# EAGLE board D1-Nixi-6csöves-z573m-V2 (EAGLE 6.3)
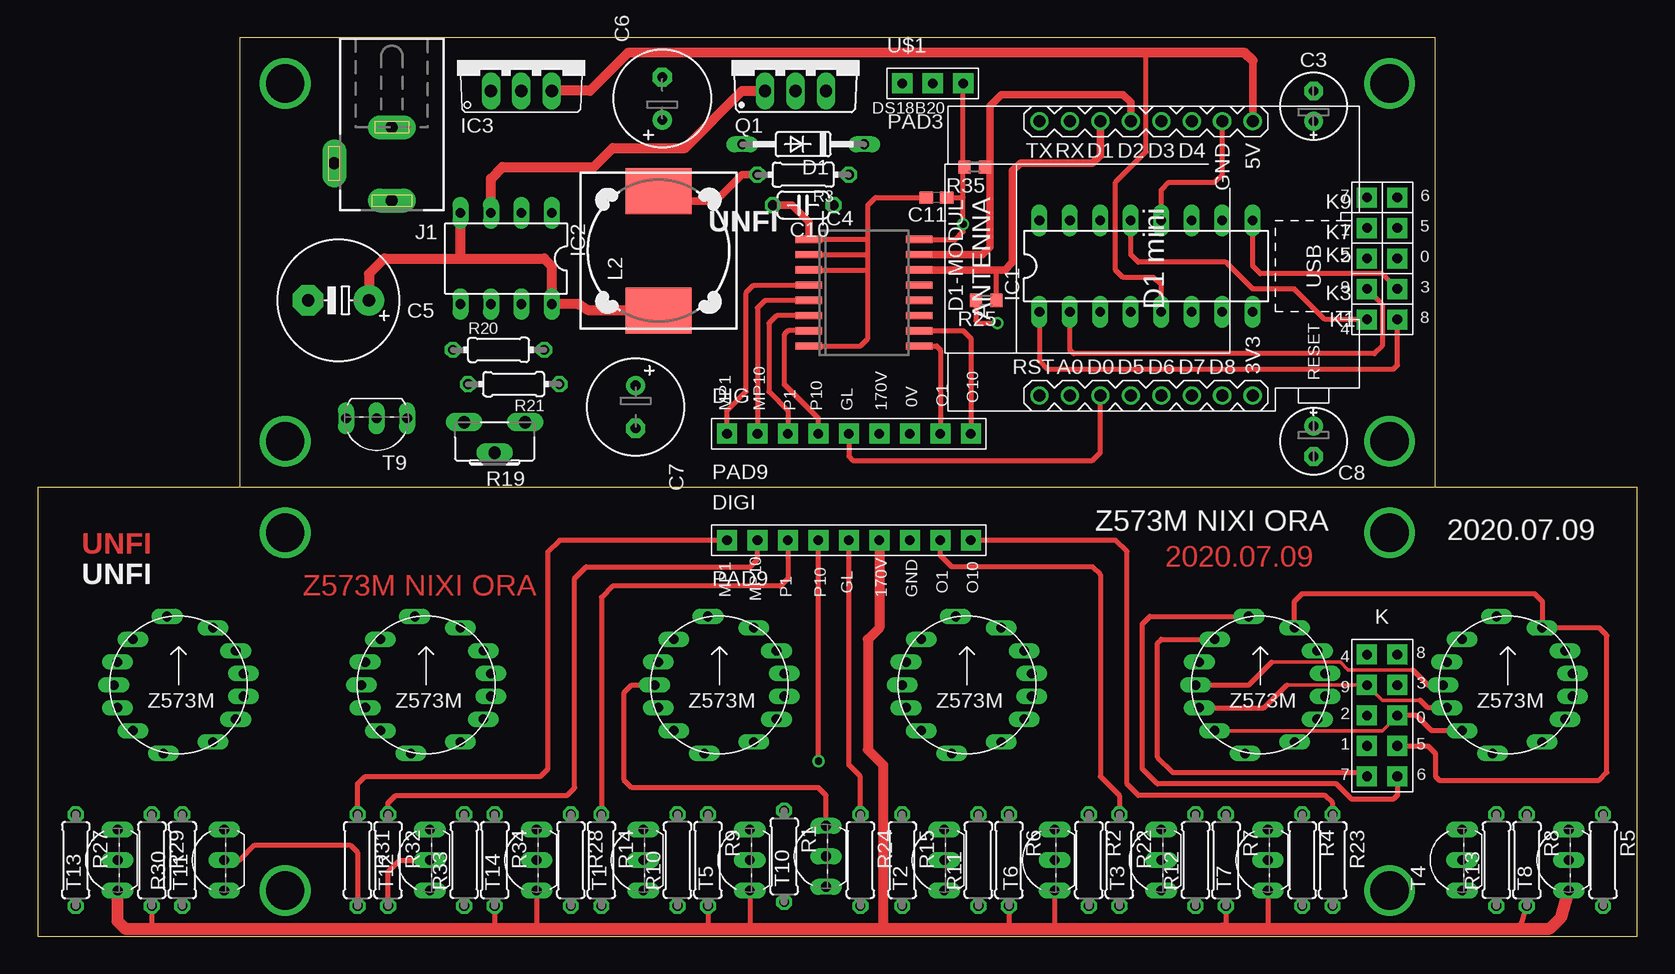
[diagram p0: board, top side]
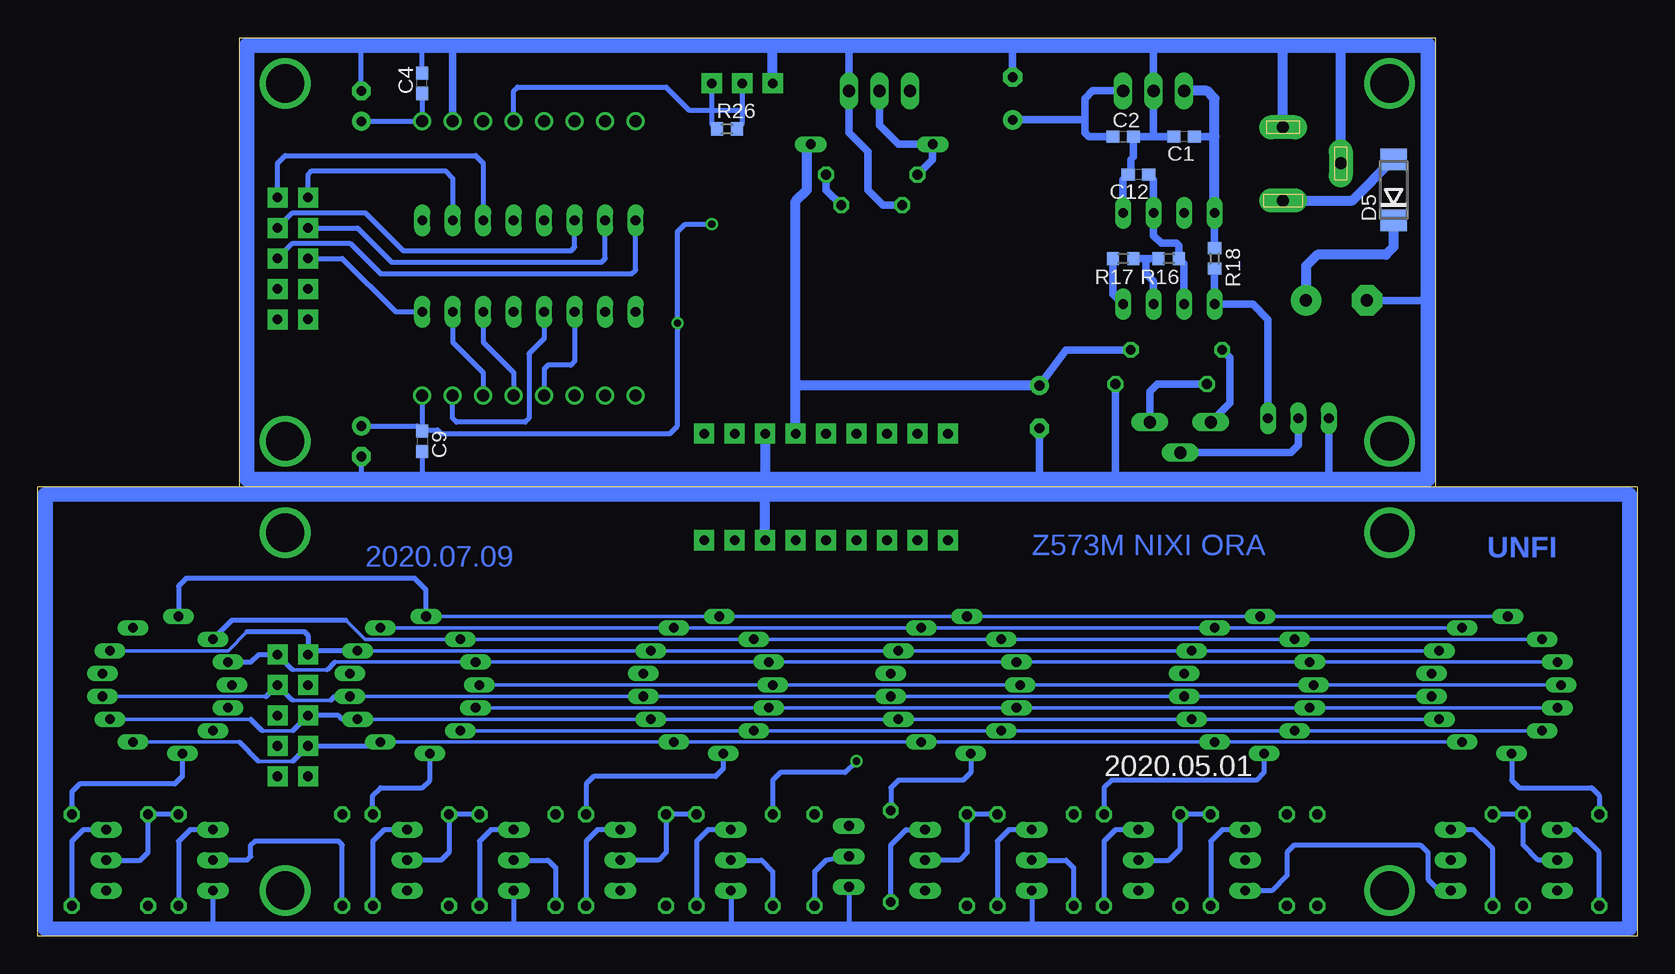
[diagram p1: board, bottom side, seen from below]

Size 133.35 x 74.93 mm. Coordinates in mm from the lower left corner, seen from the top.
Outline: 16.83,37.47 0,37.47 0,0 133.35,0 133.35,37.47 116.52,37.47
Outline: 16.83,37.47 116.5,37.47 116.5,74.92 16.83,74.92
Outline: 16.83,74.93 16.83,74.92
Outline: 16.83,74.92 16.83,37.47
Copper layers (1*16): Top 0.035mm / dielectric 1.5mm / Bottom 0.035mm
Design rules "default": minimum track width 10mil, minimum drill 24mil, track to track 8mil, track to pad 8mil, pad to pad 8mil, via to via 8mil, smd to smd 8mil, copper to edge 40mil, drill to drill 8mil, minimum pad ring 10mil, minimum via ring 8mil, stop-mask expansion 4mil, vias tented up to drill 0mil, thermal gap 10mil

## Footprints (pad centres in the part's own frame; a part is rotated, then mirrored left to right if it is on the bottom)
C0603 = smd 1.1 x 1: 1 -0.85,0; 2 0.85,0
E2,5-6E = drill 0.813 pad 1.575: + -1.27,0 | drill 0.813 pad 1.575 octagon: - 1.27,0
E5-10,5 = drill 1.016 pad 2.54: + -2.54,0 | drill 1.016 pad 2.54 octagon: - 2.54,0
E3,5-8 = drill 0.813 pad 1.6: + -1.778,0 | drill 0.813 pad 1.6 octagon: - 1.778,0
C050-024X044 = drill 0.813 octagon: 1 -2.54,0; 2 2.54,0
DO35-10 = drill 0.813 long: A 5.08,0; C -5.08,0
WEMOS-D1-MINI = drill 1: JP1.1 -11.43,9.525; JP1.2 -11.43,6.985; JP1.3 -11.43,4.445; JP1.4 -11.43,1.905; JP1.5 -11.43,-0.635; JP1.6 -11.43,-3.175; JP1.7 -11.43,-5.715; JP1.8 -11.43,-8.255; JP2.1 11.43,9.525; JP2.2 11.43,6.985; JP2.3 11.43,4.445; JP2.4 11.43,1.905; JP2.5 11.43,-0.635; JP2.6 11.43,-3.175; JP2.7 11.43,-5.715; JP2.8 11.43,-8.255
DO214AA = smd 1.8 x 2.2: A 2.55,0; C -2.55,0
PAD9 = drill 0.8 pad 1.676 square: P$1 0,0; P$2 2.54,0; P$3 5.08,0; P$4 7.62,0; P$5 10.16,0; P$6 12.7,0; P$7 15.24,0; P$8 17.78,0; P$9 20.32,0
DIL16 = drill 0.813 long: 1 -8.89,-3.81; 2 -6.35,-3.81; 3 -3.81,-3.81; 4 -1.27,-3.81; 5 1.27,-3.81; 6 3.81,-3.81; 7 6.35,-3.81; 8 8.89,-3.81; 9 8.89,3.81; 10 6.35,3.81; 11 3.81,3.81; 12 1.27,3.81; 13 -1.27,3.81; 14 -3.81,3.81; 15 -6.35,3.81; 16 -8.89,3.81
DIL08 = drill 0.813 long: 1 -3.81,-3.81; 2 -1.27,-3.81; 3 1.27,-3.81; 4 3.81,-3.81; 5 3.81,3.81; 6 1.27,3.81; 7 -1.27,3.81; 8 -3.81,3.81
TO220V = drill 1.016 long: 1 -2.54,-2.54; 2 0,-2.54; 3 2.54,-2.54
SO16W = smd 0.6 x 2.2: 1 -4.445,-4.6; 2 -3.175,-4.6; 3 -1.905,-4.6; 4 -0.635,-4.6; 5 0.635,-4.6; 6 1.905,-4.6; 7 3.175,-4.6; 8 4.445,-4.6; 9 4.445,4.6; 10 3.175,4.6; 11 1.905,4.6; 12 0.635,4.6; 13 -0.635,4.6; 14 -1.905,4.6; 15 -3.175,4.6; 16 -4.445,4.6
DCJ0202 = drill 1 pad 2 long: 1 0,3.1; 2 4.8,0; 3 0,-3
PAD25 = drill 0.8 pad 1.676 square: P$1 0,0; P$2 0,2.54; P$3 2.54,0; P$4 2.54,2.54; P$5 5.08,0; P$6 5.08,2.54; P$7 7.62,0; P$8 7.62,2.54; P$9 10.16,0; P$10 10.16,2.54
PAD1 = drill 0.8 pad 1.676 square: 1 0,0
DR125 = smd 3.85 x 5.5: 1 -4.975,0; 2 4.975,0
Z573SZ1 = drill 0.8 pad 1.27 long: A 1.27,5.715; DP 5.397,0; IC -5.397,-0.953; K0 3.81,3.81; K1 -2.857,4.763; K2 -4.763,2.857; K3 -5.397,0.953; K4 -4.763,-2.857; K5 -2.857,-4.763; K6 0.953,-5.715; K7 3.81,-3.81; K8 5.08,-1.905; K9 5.08,1.905
TO220BV = drill 1.016 long: D 0,-2.54; G -2.54,-2.54; S 2.54,-2.54
0207/7 = drill 0.813 octagon: 1 -3.81,0; 2 3.81,0
0204/7 = drill 0.813 octagon: 1 -3.81,0; 2 3.81,0
R0603 = smd 1 x 1.1: 1 -0.85,0; 2 0.85,0
CA6H = drill 1.016 long: A -2.54,0; E 2.54,0; S 0,2.54
TO92-EBC = drill 0.813 long: B 0,-1.27; C 2.54,-1.27; E -2.54,-1.27
TO92-CBE = drill 0.813 long: B 0,0; C -2.54,0; E 2.54,0
PAD3 = drill 0.8 pad 1.676 square: P$1 0,0; P$2 2.54,0; P$3 5.08,0

## Placement (x,y rotation side)
C1  100n  [C0603]  37.78,66.68 180 bottom
C2  100n  [C0603]  42.86,66.68 0 bottom
C3  10u  [E2,5-6E]  106.36,69.22 90 top
C4  100n  [C0603]  101.28,71.12 90 bottom
C5  470uF  [E5-10,5]  25.08,53.02 180 top
C6  100uF  [E3,5-8]  52.07,69.85 90 top
C7  2,2uF 400V  [E3,5-8]  49.85,44.13 270 top
C8  10u  [E2,5-6E]  106.36,41.28 270 top
C9  100n  [C0603]  101.28,41.28 270 bottom
C10  100p  [C050-024X044]  63.82,60.96 180 top
C11  100n  [C0603]  74.93,61.59 180 top
C12  2n2  [C0603]  41.59,63.5 180 bottom
D1  UF4004  [DO35-10]  63.82,66.04 180 top
D1-MODUL  WEMOS-D1-MINI  [WEMOS-D1-MINI]  93.03,56.52 90 top
D5  1S34  [DO214AA]  20.32,62.23 90 bottom
DIG  PAD9  [PAD9]  57.47,41.91 0 top
DIGI  PAD9  [PAD9]  57.47,33.02 0 top
IC1  74141N  [DIL16]  92.39,55.88 0 top
IC2  ICM7555  [DIL08]  39.05,56.52 180 top
IC3  7805  [TO220V]  40.32,73.03 0 top
IC4  PCF8574T  [SO16W]  68.9,53.66 270 top
J1  DCJ0202  [DCJ0202]  29.53,64.45 180 top
K  PAD25  [PAD25]  110.81,23.5 270 top
K0  PAD1  [PAD1]  113.35,61.59 90 top
K1  PAD1  [PAD1]  110.81,51.44 90 top
K2  PAD1  [PAD1]  113.35,51.44 90 top
K3  PAD1  [PAD1]  110.81,53.98 90 top
K4  PAD1  [PAD1]  113.35,53.98 90 top
K5  PAD1  [PAD1]  110.81,56.52 90 top
K6  PAD1  [PAD1]  113.35,56.52 90 top
K7  PAD1  [PAD1]  110.81,59.06 90 top
K8  PAD1  [PAD1]  113.35,59.06 90 top
K9  PAD1  [PAD1]  110.81,61.59 90 top
L2  DR125  [DR125]  51.75,57.15 90 top
M.PERC1  ora10  [Z573SZ1]  11.75,20.96 180 top
M.PERC10  Z573SZ1  [Z573SZ1]  32.38,20.96 180 top
ORA1  Z573SZ1  [Z573SZ1]  101.92,20.96 180 top
ORA10  Z573SZ1  [Z573SZ1]  122.56,20.96 180 top
PERC1  ora10  [Z573SZ1]  56.83,20.96 180 top
PERC10  Z573SZ1  [Z573SZ1]  77.47,20.96 180 top
Q1  IRF740  [TO220BV]  63.18,73.03 0 top
R1  15k  [0207/7]  62.23,6.67 270 top
R2  15k  [0207/7]  87.63,6.35 270 top
R3  2k2  [0204/7]  63.82,63.5 180 top
R4  15k  [0207/7]  105.41,6.35 270 top
R5  15k  [0207/7]  130.49,6.35 270 top
R6  100k  [0207/7]  80.96,6.35 270 top
R7  100k  [0207/7]  99.06,6.35 270 top
R8  100k  [0207/7]  124.14,6.35 270 top
R9  100k  [0207/7]  55.88,6.35 270 top
R10  470k  [0207/7]  53.34,6.35 90 top
R11  470k  [0207/7]  78.42,6.35 90 top
R12  470k  [0207/7]  96.52,6.35 90 top
R13  470k  [0207/7]  121.6,6.35 90 top
R14  10k  [0207/7]  46.99,6.35 270 top
R15  10k  [0207/7]  72.07,6.35 270 top
R16  10k  [R0603]  39.05,56.52 180 bottom
R17  1k  [R0603]  42.86,56.52 180 bottom
R18  56k  [R0603]  35.24,56.52 270 bottom
R19  1k  [CA6H]  38.1,42.86 180 top
R20  220k  [0204/7]  38.42,48.9 0 top
R21  470  [0204/7]  39.69,46.04 180 top
R22  10k  [0207/7]  90.17,6.35 270 top
R23  10k  [0207/7]  107.95,6.35 270 top
R24  10k  [0207/7]  68.58,6.35 270 top
R25  3k3  [R0603]  79.06,53.02 180 top
R26  3k3  [R0603]  75.88,67.31 0 bottom
R27  15k  [0207/7]  3.18,6.35 270 top
R28  15k  [0207/7]  44.45,6.35 270 top
R29  100k  [0207/7]  9.53,6.35 270 top
R30  470k  [0207/7]  12.07,6.35 90 top
R31  10k  [0207/7]  26.67,6.35 270 top
R32  10k  [0207/7]  29.21,6.35 270 top
R33  470k  [0207/7]  35.56,6.35 90 top
R34  100k  [0207/7]  38.1,6.35 270 top
R35  3k3  [R0603]  78.11,64.14 180 top
T1  MPSA42  [TO92-EBC]  49.21,6.35 90 top
T2  MPSA42  [TO92-EBC]  74.3,6.35 90 top
T3  MPSA42  [TO92-EBC]  92.39,6.35 90 top
T4  MPSA42  [TO92-EBC]  117.47,6.35 90 top
T5  MPSA92  [TO92-EBC]  58.1,6.35 90 top
T6  MPSA92  [TO92-EBC]  83.5,6.35 90 top
T7  MPSA92  [TO92-EBC]  101.28,6.35 90 top
T8  MPSA92  [TO92-EBC]  126.36,6.35 90 top
T9  BC337  [TO92-CBE]  28.26,43.18 180 top
T10  MPSA42  [TO92-EBC]  64.45,6.67 90 top
T11  MPSA42  [TO92-EBC]  14.29,6.35 90 top
T12  MPSA42  [TO92-EBC]  31.43,6.35 90 top
T13  MPSA92  [TO92-EBC]  5.4,6.35 90 top
T14  MPSA92  [TO92-EBC]  40.32,6.35 90 top
U$1  PAD3  [PAD3]  72.07,71.12 0 top

## Library data of the parts
C1-C12 R1-R18 R20-R35 = resistor
D1 D5 = diode
D1-MODUL = diy-modules
DIG DIGI K K0 K1-K9 U$1 = tuskesor
IC1 = 74xx-eu
IC2 = maxim1; MF: MAXIM; MPN: ICM7555IPA+; OC_FARNELL: 9663762; OC_NEWARK: 68K4387
IC3 = linear
IC4 = micro-philips; MPN: PCF8574T/3,512; OC_FARNELL: 1201255; OC_NEWARK: 70R6870
J1 = con-jack; OC_FARNELL: unknown; OC_NEWARK: unknown
L2 = inductors
M.PERC1 M.PERC10 ORA1 ORA10 PERC1 PERC10 =    Z573M
Q1 = transistor-power
R19 = pot
T1-T14 = transistor

## Nets
0V: C1.2 C2.2 C3.- C4.2 C5.- C6.- C7.- C8.- C9.2 C10.2 C11.2 C12.2 D1-MODUL.JP2.7 DIG.P$7 IC1.12 IC2.1 IC3.2 IC4.1 IC4.2 IC4.3 IC4.8 J1.2 J1.3 Q1.S R21.1 T9.E U$1.P$1
3V3: C8.+ C9.1 C11.1 D1-MODUL.JP1.8 IC4.16 R25.2 R26.1 R35.2 U$1.P$3
+12V: C1.1 C5.+ D5.C IC2.4 IC2.8 IC3.1 L2.1 R17.2 R18.1
A: D1-MODUL.JP1.4 IC1.3
B: D1-MODUL.JP1.5 IC1.6
C: D1-MODUL.JP1.6 IC1.7
D: D1-MODUL.JP1.7 IC1.4
GND: DIGI.P$7 T1.E T2.E T3.E T4.E T10.E
GND1: T11.E T12.E
N$1: DIG.P$9 IC4.10
N$2: DIG.P$4 IC4.7
N$3: DIG.P$8 IC4.9
N$4: DIG.P$1 IC4.4
N$5: DIG.P$2 IC4.5
N$6: DIG.P$3 IC4.6
N$7: IC1.16 K6.1
N$8: IC1.10 K9.1
N$9: IC1.15 K7.1
N$10: PERC1.A R1.1
N$11: PERC10.A R2.1
N$12: ORA1.A R4.1
N$13: ORA10.A R5.1
N$14: R1.2 T5.C
N$15: R2.2 T6.C
N$16: R4.2 T7.C
N$17: R5.2 T8.C
N$18: R19.E R20.1
N$19: R10.1 T1.C
N$20: R19.A R21.2
N$21: R9.1 R10.2 T5.B
N$22: IC2.3 Q1.G
N$23: IC2.7 R16.2 R17.1
N$24: C12.1 IC2.2 IC2.6 R16.1
N$25: R6.1 R11.2 T6.B
N$26: IC2.5 R18.2 T9.C
N$27: C10.1 R3.1
N$28: C7.+ D1.C DIG.P$6 R20.2
N$29: R7.1 R12.2 T7.B
N$30: R8.1 R13.2 T8.B
N$31: R11.1 T2.C
N$32: R12.1 T3.C
N$33: R13.1 T4.C
N$34: R14.2 T1.B
N$35: R15.2 T2.B
N$36: R22.2 T3.B
N$37: R23.2 T4.B
N$38: R24.2 T10.B
N$39: DIGI.P$6 R6.2 R7.2 R8.2 R9.2 R29.2 R34.2 T5.E T6.E T7.E T8.E T13.E T14.E
N$40: DIGI.P$3 R14.1
N$41: DIGI.P$4 R15.1
N$42: K.P$6 M.PERC1.K0 M.PERC10.K0 ORA1.K0 ORA10.K0 PERC1.K0 PERC10.K0
N$44: D1.A L2.2 Q1.D R3.2
N$45: K.P$7 M.PERC1.K1 M.PERC10.K1 ORA1.K1 ORA10.K1 PERC1.K1 PERC10.K1
N$46: IC1.8 K5.1
N$47: IC1.9 K4.1
N$48: IC1.2 K3.1
N$49: IC1.1 K2.1
N$50: IC1.13 K1.1
N$51: IC1.14 K8.1
N$52: IC1.11 K0.1
N$53: D1-MODUL.JP1.3 DIG.P$5
N$56: K.P$5 M.PERC1.K2 M.PERC10.K2 ORA1.K2 ORA10.K2 PERC1.K2 PERC10.K2
N$57: K.P$4 M.PERC1.K3 M.PERC10.K3 ORA1.K3 ORA10.K3 PERC1.K3 PERC10.K3
N$58: K.P$1 M.PERC1.K4 M.PERC10.K4 ORA1.K4 ORA10.K4 PERC1.K4 PERC10.K4
N$59: K.P$8 M.PERC1.K5 M.PERC10.K5 ORA1.K5 ORA10.K5 PERC1.K5 PERC10.K5
N$60: D5.A J1.1
N$61: K.P$10 M.PERC1.K6 M.PERC10.K6 ORA1.K6 ORA10.K6 PERC1.K6 PERC10.K6
N$62: K.P$9 M.PERC1.K7 M.PERC10.K7 ORA1.K7 ORA10.K7 PERC1.K7 PERC10.K7
N$63: K.P$2 M.PERC1.K8 M.PERC10.K8 ORA1.K8 ORA10.K8 PERC1.K8 PERC10.K8
N$64: K.P$3 M.PERC1.K9 M.PERC10.K9 ORA1.K9 ORA10.K9 PERC1.K9 PERC10.K9
N$67: DIGI.P$8 R22.1
N$68: DIGI.P$9 R23.1
N$69: DIGI.P$5 R24.1
N$71: C2.1 C3.+ C4.1 C6.+ D1-MODUL.JP2.8 IC1.5 IC3.3
N$80: D1-MODUL.JP2.5 R26.2 U$1.P$2
N$82: M.PERC1.A R27.1
N$83: M.PERC10.A R28.1
N$84: R27.2 T13.C
N$85: R28.2 T14.C
N$86: R30.1 T11.C
N$87: R31.2 T11.B
N$88: R32.2 T12.B
N$90: R29.1 R30.2 T13.B
N$91: R33.2 R34.1 T14.B
N$102: DIGI.P$1 R31.1
N$103: DIGI.P$2 R32.1
N$104: R33.1 T12.C
N$105: M.PERC1.DP M.PERC10.DP ORA1.DP ORA10.DP PERC1.DP PERC10.DP T10.C
N$119: R19.S T9.B
SCL: D1-MODUL.JP2.3 IC4.14 R25.1
SDA: D1-MODUL.JP2.4 IC4.15 R35.1

## Tracks (layer width: path | path; a pad name or v marks a point on that pad's centre or on a via)
0V
  Top 0.406: 69.22,55.56 69.22,49.85 68.58,49.21 IC4.8 | 69.22,55.56 69.22,56.83 | 69.22,56.83 69.22,58.1 | 69.22,58.1 IC4.1 | IC4.2 69.22,56.83 | IC4.3 69.22,55.56 | IC1.12 93.66,62.23 94.3,62.87 98.11,62.87 98.74,63.5 D1-MODUL.JP2.7 | 69.22,58.1 69.22,60.96 69.85,61.59 C11.2
  Top 0.61: IC4.1 64.3,59.53 62.87,60.96 C10.2
  Bottom 0.406: C4.2 101.28,74.3 | C9.2 101.28,38.1 | C8.- 106.36,38.1 | C3.- 106.36,74.3
  Bottom 0.61: 40.32,74.3 IC3.2 40.32,66.68 | C6.- 52.07,74.3 | 24.73,73.94 25.08,74.3 | C1.2 40.32,66.68 | 40.32,66.68 C2.2 42.01,64.98 42.23,64.77 42.23,63.72 C12.2 42.86,63.08 IC2.1 | R21.1 43.5,38.1 | 65.72,74.3 Q1.S 65.72,66.99 64.13,65.41 64.13,62.23 62.87,60.96 C10.2 | C5.- 17.46,53.02 | D1-MODUL.JP2.7 98.74,74.3 | C7.- 49.85,38.1 | T9.E 25.72,38.1
  Bottom 0.813: J1.3 29.53,74.3 | J1.2 24.73,73.94 | U$1.P$1 72.07,74.3 | DIG.P$7 72.71,38.1
  Bottom 1.27: 17.46,38.1 25.72,38.1 43.5,38.1 49.85,38.1 72.71,38.1 101.28,38.1 106.36,38.1 115.89,38.1 115.89,74.3 106.36,74.3 101.28,74.3 98.74,74.3 72.07,74.3 65.72,74.3 52.07,74.3 40.32,74.3 29.53,74.3 25.08,74.3 17.46,74.3 17.46,53.02 17.46,38.1
3V3  (via drill 0.6)
  Top 0.406: IC4.16 76.52,58.1 77.15,58.74 v77.15,59.37 77.15,61.59 | 77.15,61.59 77.15,64.14 | 77.15,64.14 U$1.P$3 | C11.1 77.15,61.59 | R35.2 77.15,64.14 | R25.2 78.21,51.33 78.42,51.12 v80.01,51.12
  Bottom 0.406: C8.+ 101.7,42.55 C9.1 101.28,42.23 | U$1.P$3 77.15,67.73 R26.1 | D1-MODUL.JP1.8 101.28,42.23 | 101.28,42.23 100.01,42.23 99.7,41.91 80.65,41.91 80.01,42.55 80.01,50.48 v80.01,51.12 80.01,58.74 79.37,59.37 v77.15,59.37
+12V
  Top 0.813: 35.24,56.52 28.89,56.52 27.62,55.25 C5.+ | 35.24,56.52 IC2.4 | 35.24,56.52 42.23,56.52 42.86,55.88 IC2.8 45.09,52.71 45.93,52.18 L2.1
  Bottom 0.61: R18.1 IC2.4 | C1.1 35.24,66.68 | R17.2 43.71,53.56 IC2.8
  Bottom 0.813: IC2.4 35.24,66.68 35.24,69.85 35.88,70.49 IC3.1 | D5.C 20.32,57.47 20.96,56.83 26.67,56.83 27.62,55.88 C5.+
A
  Bottom 0.406: IC1.3 88.58,47.94 88.9,47.62 90.81,47.62 91.12,47.31 D1-MODUL.JP1.4
B
  Bottom 0.406: IC1.6 96.2,49.53 93.66,46.99 D1-MODUL.JP1.5
C
  Bottom 0.406: IC1.7 98.74,49.53 96.2,46.99 D1-MODUL.JP1.6
D
  Bottom 0.406: IC1.4 91.12,49.85 92.39,48.58 92.39,43.18 92.71,42.86 98.42,42.86 98.74,43.18 D1-MODUL.JP1.7
GND
  Bottom 0.406: T4.E 118.75,0.64 | T2.E 75.56,0.64 | T3.E 93.66,0.64 | T10.E 65.72,0.64 | T1.E 50.48,0.64
  Bottom 0.813: DIGI.P$7 72.71,36.83
  Bottom 1.27: 0.64,36.83 72.71,36.83 132.72,36.83 132.72,0.64 118.75,0.64 93.66,0.64 75.56,0.64 65.72,0.64 50.48,0.64 0.64,0.64 0.64,36.83
GND1
  Bottom 0.406: T11.E 16.51,3.81 17.46,4.76 17.46,6.99 18.1,7.62 28.58,7.62 29.21,6.99 29.21,5.08 30.48,3.81 T12.E
N$1
  Top 0.406: IC4.10 77.15,50.48 77.79,49.85 DIG.P$9
N$2
  Top 0.406: IC4.7 62.55,50.48 62.23,50.17 62.23,46.04 65.09,43.18 DIG.P$4
N$3
  Top 0.406: IC4.9 74.93,49.21 75.25,48.9 DIG.P$8
N$4
  Top 0.406: DIG.P$1 57.47,43.82 59.05,45.4 59.05,53.66 59.69,54.29 IC4.4
N$5
  Top 0.406: IC4.5 60.64,53.02 60.01,52.39 DIG.P$2
N$6
  Top 0.406: IC4.6 61.59,51.75 60.96,51.12 60.96,45.4 62.55,43.82 DIG.P$3
N$7
  Bottom 0.406: K6.1 112.08,57.79 107.31,57.79 104.78,55.25 83.82,55.25 83.5,55.56 IC1.16
N$8
  Bottom 0.406: K9.1 110.81,63.5 110.49,63.82 99.38,63.82 98.74,63.18 IC1.10
N$9
  Bottom 0.406: K7.1 106.68,59.06 103.82,56.2 86.36,56.2 86.04,56.52 IC1.15
N$10
  Bottom 0.406: PERC1.A 55.56,13.65 56.2,13.02 61.59,13.02 62.23,12.38 R1.1
N$11
  Bottom 0.406: PERC10.A 76.2,13.97 76.84,13.34 87,13.34 87.63,12.7 R2.1
N$12
  Bottom 0.406: R4.1 105.41,11.75 104.78,12.38 101.28,12.38 100.65,13.02 ORA1.A
N$13
  Bottom 0.406: ORA10.A 121.28,13.34 121.92,12.7 129.86,12.7 130.49,12.07 R5.1
N$14
  Bottom 0.406: R1.2 62.23,7.62 60.96,8.89 T5.C
N$15
  Bottom 0.406: T6.C 86.68,8.89 87.63,7.94 R2.2
N$16
  Bottom 0.406: T7.C 104.46,8.89 105.41,7.94 R4.2
N$17
  Bottom 0.406: T8.C 129.54,8.89 130.49,7.94 R5.2
N$18
  Bottom 0.61: R19.E 33.97,44.45 33.97,48.26 R20.1
N$19
  Bottom 0.406: T1.C 52.39,8.89 53.34,7.94 R10.1
N$20
  Bottom 0.61: R21.2 40,46.04 40.64,45.4 R19.A
N$21
  Bottom 0.406: R10.2 R9.1 55.88,6.99 56.52,6.35 T5.B
N$22
  Top 0.813: IC2.3 37.78,63.18 38.73,64.14 46.35,64.14 47.94,65.72 53.98,65.72 58.74,70.49 Q1.G
N$23
  Bottom 0.61: R17.1 40.96,56.52 | 40.96,56.52 R16.2 | IC2.7 40.32,54.61 40.96,55.25 40.96,56.52
N$24
  Bottom 0.61: C12.1 40.32,63.08 IC2.2 40.32,58.42 39.69,57.79 38.42,57.79 38.2,57.57 R16.1 37.78,56.09 IC2.6
N$25
  Bottom 0.406: R11.2 R6.1 80.96,6.99 81.6,6.35 T6.B
N$26
  Bottom 0.61: R18.2 IC2.5 32.07,52.71 30.8,51.44 T9.C
N$27
  Bottom 0.61: R3.1 67.63,62.23 C10.1
N$28
  Bottom 0.61: R20.2 47.62,48.9 C7.+
  Bottom 0.813: DIG.P$6 70.17,46.04 | 70.17,46.04 70.17,61.28 69.22,62.23 69.22,65.72 D1.C | C7.+ 70.04,45.91 70.17,46.04
N$29
  Bottom 0.406: R12.2 R7.1 99.06,6.99 99.7,6.35 T7.B
N$30
  Bottom 0.406: R13.2 R8.1 124.14,6.99 124.78,6.35 T8.B
N$31
  Bottom 0.406: T2.C 77.47,8.89 78.42,7.94 R11.1
N$32
  Bottom 0.406: T3.C 95.57,8.89 96.52,7.94 R12.1
N$33
  Bottom 0.406: T4.C 120.65,8.89 121.6,7.94 R13.1
N$34
  Bottom 0.406: T1.B 47.62,6.35 46.99,5.72 R14.2
N$35
  Bottom 0.406: T2.B 73.02,6.35 72.07,5.4 R15.2
N$36
  Bottom 0.406: T3.B 90.81,6.35 90.17,5.72 R22.2
N$37
  Bottom 0.406: R23.2 107.95,7.62 108.27,7.94 115.25,7.94 115.57,7.62 115.57,6.67 115.89,6.35 T4.B
N$38
  Bottom 0.406: T10.B 67.63,6.35 68.58,5.4 R24.2
N$39
  Top 0.406: R8.2 123.51,0.64 | T7.E 102.55,0.64 | R7.2 99.06,0.95 98.74,0.64 | T6.E 84.77,0.64 | R6.2 80.96,0.64 | T5.E 59.37,0.64 | R9.2 55.88,0.64 | T14.E 41.59,0.64 | R34.2 38.1,0.64 | R29.2 9.52,0.64
  Top 0.813: DIGI.P$6 70.17,25.72 69.22,24.77 69.22,15.56 70.48,14.29 70.48,0.95 70.8,0.64
  Top 1.016: T13.E 6.67,1.27 7.3,0.64 9.52,0.64 38.1,0.64 41.59,0.64 55.88,0.64 59.37,0.64 70.8,0.64 80.96,0.64 84.77,0.64 98.74,0.64 102.55,0.64 123.51,0.64 126.05,0.64 127,1.59 T8.E
N$40
  Top 0.406: DIGI.P$3 62.55,29.85 61.91,29.21 47.94,29.21 46.99,28.26 R14.1
N$41  (via drill 0.6)
  Top 0.406: v65.09,14.61 DIGI.P$4
  Bottom 0.406: v65.09,14.61 66.04,13.65 71.44,13.65 72.07,13.02 R15.1
N$42
  Top 0.305: ORA1.K0 112.08,17.15 K.P$6
  Top 0.406: ORA10.K0 116.2,17.15 114.94,18.42 K.P$6
  Bottom 0.305: M.PERC1.K0 M.PERC10.K0 PERC1.K0 PERC10.K0 ORA1.K0
N$43  (via drill 3.2)
  other vias: 20.64,3.81
N$44
  Top 0.61: R3.2 58.74,63.5 56.52,61.28 51.86,61.28 L2.2
  Bottom 0.61: Q1.D 63.18,67.63 61.59,66.04 D1.A 58.74,64.77 R3.2
N$45
  Bottom 0.305: M.PERC1.K1 M.PERC10.K1 PERC1.K1 PERC10.K1 ORA1.K1 | 112.08,14.61 114.94,14.61 | 116.52,16.19 ORA10.K1
  Bottom 0.406: ORA1.K1 105.09,15.88 K.P$7 112.08,14.61 | 114.94,14.61 116.52,16.19
N$46
  Bottom 0.406: K5.1 107.95,56.52 103.5,52.07 IC1.8
N$47
  Top 0.406: K4.1 112.08,55.25 101.92,55.25 101.28,55.88 IC1.9
N$48
  Top 0.406: K3.1 112.08,52.71 112.08,49.21 111.44,48.58 86.36,48.58 86.04,48.9 IC1.2
N$49
  Top 0.406: IC1.1 83.5,47.94 84.14,47.31 113.03,47.31 113.35,47.62 K2.1
N$50
  Top 0.406: K1.1 107.31,51.44 104.78,53.98 101.28,53.98 99.06,56.2 91.76,56.2 91.12,56.83 IC1.13
N$51
  Bottom 0.406: K8.1 112.08,60.33 106.05,60.33 102.87,57.15 88.9,57.15 88.58,57.47 IC1.14
N$52
  Bottom 0.406: K0.1 113.35,64.45 112.71,65.09 96.84,65.09 96.2,64.45 IC1.11
N$53
  Top 0.406: DIG.P$5 67.63,40.01 67.94,39.69 87.95,39.69 88.58,40.32 D1-MODUL.JP1.3
N$56
  Bottom 0.305: M.PERC1.K2 M.PERC10.K2 PERC1.K2 PERC10.K2 ORA1.K2 | 112.08,17.15 114.62,17.15 | 115.57,18.1 ORA10.K2
  Bottom 0.406: ORA1.K2 107.95,18.1 108.27,18.42 K.P$5 112.08,17.15 | 114.62,17.15 115.57,18.1
N$57
  Bottom 0.305: M.PERC1.K3 M.PERC10.K3 PERC1.K3 PERC10.K3 ORA1.K3 | ORA10.K3 114.3,20 | 108.9,19.69 112.08,19.69
  Bottom 0.406: 114.3,20 K.P$4 112.08,19.69 | ORA1.K3 108.58,20 108.9,19.69
N$58
  Bottom 0.305: M.PERC1.K4 M.PERC10.K4 PERC1.K4 PERC10.K4 ORA1.K4 | ORA10.K4 117.47,23.81 115.89,25.4
  Bottom 0.406: ORA1.K4 110.49,23.81 K.P$1 110.81,25.08 111.12,25.4 115.89,25.4
N$59
  Top 0.406: ORA1.K5 104.78,27.94 105.41,28.58 124.78,28.58 125.41,27.94 ORA10.K5 130.17,25.72 130.81,25.08 130.81,13.65 130.17,13.02 116.84,13.02 116.52,13.34 116.52,15.24 115.89,15.88 K.P$8
  Bottom 0.305: M.PERC1.K5 M.PERC10.K5 PERC1.K5 PERC10.K5 ORA1.K5
N$60
  Bottom 0.813: J1.1 23.75,61.35 D5.A
N$61
  Top 0.406: ORA1.K6 92.71,26.67 92.08,26.04 92.08,13.97 93.34,12.7 108.27,12.7 109.54,11.43 113.03,11.43 113.35,11.75 K.P$10
  Bottom 0.305: M.PERC1.K6 M.PERC10.K6 PERC1.K6 PERC10.K6 ORA1.K6
  Bottom 0.406: ORA1.K6 100.97,28.89 101.92,29.85 120.97,29.85 121.6,29.21 ORA10.K6
N$62
  Top 0.406: ORA1.K7 93.66,24.77 93.34,24.45 93.34,14.92 94.61,13.65 110.49,13.65 K.P$9
  Bottom 0.305: M.PERC1.K7 M.PERC10.K7 PERC1.K7 PERC10.K7 ORA1.K7 106.05,24.77 107.63,26.35
  Bottom 0.406: 107.63,26.35 117.16,26.35 ORA10.K7
N$63
  Bottom 0.305: M.PERC1.K8 M.PERC10.K8 PERC1.K8 PERC10.K8 ORA1.K8 108.58,22.86 | 109.22,22.23 112.08,22.23
  Bottom 0.406: 108.58,22.86 109.22,22.23 | 112.08,22.23 K.P$2 114.94,23.5 115.57,22.86 ORA10.K8
N$64
  Top 0.305: 104.14,20.96 K.P$3 112.08,19.69 115.25,19.69
  Top 0.406: ORA1.K9 102.23,19.05 104.14,20.96 | ORA10.K9 115.89,19.05 115.25,19.69
  Bottom 0.305: M.PERC1.K9 M.PERC10.K9 PERC1.K9 PERC10.K9 ORA1.K9
N$67
  Top 0.406: DIGI.P$8 75.25,31.75 76.2,30.8 87.95,30.8 88.58,30.16 88.58,13.34 90.17,11.75 R22.1
N$68
  Top 0.406: R23.1 107.95,11.11 107.31,11.75 91.76,11.75 90.81,12.7 90.81,32.07 89.85,33.02 DIGI.P$9
N$69
  Top 0.406: R24.1 68.58,13.34 67.63,14.29 DIGI.P$5
N$70  (via drill 3.2)
  other vias: 112.71,41.28
N$71
  Top 0.406: IC1.5 93.66,54.29 93.03,54.93 90.49,54.93 89.85,55.56 89.85,62.87 92.39,65.41 92.39,73.66
  Top 0.61: D1-MODUL.JP2.8 101.28,73.03
  Top 0.813: 101.28,73.03 100.65,73.66 92.39,73.66 49.21,73.66 46.04,70.49 IC3.3
  Bottom 0.406: C4.1 D1-MODUL.JP2.8 C3.+
  Bottom 0.61: IC3.3 45.4,70.49 46.04,69.85 46.04,67.95 | C2.1 45.72,66.68 46.04,66.99 46.04,67.95 | C6.+ 46.16,68.07 46.04,67.95
N$72  (via drill 3.2)
  other vias: 112.71,3.81
N$73  (via drill 3.2)
  other vias: 112.71,33.66
N$74  (via drill 3.2)
  other vias: 20.64,33.66
N$75  (via drill 3.2)
  other vias: 20.64,41.28
N$76  (via drill 3.2)
  other vias: 20.64,71.12
N$77  (via drill 3.2)
  other vias: 112.71,71.12
N$80
  Bottom 0.406: U$1.P$2 74.61,68.9 | 74.61,68.9 74.61,67.73 R26.2 | D1-MODUL.JP2.5 93.66,70.49 93.34,70.8 80.96,70.8 79.06,68.9 74.61,68.9
N$82
  Bottom 0.406: M.PERC1.A 10.48,13.02 9.84,12.38 3.81,12.38 3.18,11.75 R27.1
N$83
  Bottom 0.406: M.PERC10.A 31.11,13.65 31.75,13.02 43.82,13.02 44.45,12.38 R28.1
N$84
  Bottom 0.406: R27.2 3.18,6.99 5.08,8.89 T13.C
N$85
  Bottom 0.406: T14.C 43.5,8.89 44.45,7.94 R28.2
N$86
  Bottom 0.406: R30.1 12.06,7.3 13.65,8.89 T11.C
N$87
  Top 0.406: T11.B 16.83,6.35 18.1,7.62 26.03,7.62 26.67,6.99 R31.2
N$88
  Top 0.406: R32.2 29.21,5.4 30.16,6.35 T12.B
N$90
  Bottom 0.406: R30.2 R29.1 9.52,7.62 8.26,6.35 T13.B
N$91
  Bottom 0.406: R33.2 R34.1 38.1,7.3 39.05,6.35 T14.B
N$102
  Top 0.406: DIGI.P$1 43.5,33.02 42.55,32.07 42.55,13.97 41.91,13.34 27.3,13.34 26.67,12.7 R31.1
N$103
  Top 0.406: DIGI.P$2 60.01,31.43 59.37,30.8 45.72,30.8 44.77,29.85 44.77,12.38 44.13,11.75 29.85,11.75 29.21,11.11 R32.1
N$104
  Bottom 0.406: T12.C 34.61,8.89 35.56,7.94 R33.1
N$105
  Top 0.305: 102.87,22.86 108.58,22.86 109.22,22.23 114.62,22.23
  Top 0.406: ORA1.DP 100.97,20.96 102.87,22.86 | 114.62,22.23 115.89,20.96 ORA10.DP | T10.C 65.72,11.75 65.09,12.38 49.53,12.38 48.9,13.02 48.9,20.32 49.53,20.96 PERC1.DP
  Bottom 0.305: M.PERC1.DP M.PERC10.DP PERC1.DP PERC10.DP ORA1.DP
N$119
  Bottom 0.61: R19.S 28.89,40.32 28.26,40.96 T9.B
SCL
  Top 0.406: R25.1 79.91,55.46 80.01,55.56
  Top 0.61: IC4.14 80.01,55.56 80.65,55.56 81.28,56.2 81.28,63.82 81.92,64.45 87.95,64.45 88.58,65.09 D1-MODUL.JP2.3
SDA
  Top 0.406: R35.1 79.37,64.14
  Top 0.61: IC4.15 78.74,56.83 79.37,57.47 79.37,64.14 79.37,69.22 80.33,70.17 90.49,70.17 91.12,69.53 D1-MODUL.JP2.4

## Text on the board
Top: UNFI | Z573M NIXI ORA | 2020.07.09
Bottom: UNFI | Z573M NIXI ORA | 2020.07.09
tPlace: DS18B20 | 7 | 6 | UNFI | 1 | 5 | 2 | 0 | 9 | 3 | 8 | 4 | 0V | O1 | O10 | MP1 | MP10 | P1 | P10 | GL | 170V | Z573M NIXI ORA | 2020.07.09 | UNFI | MP1 | P1 | P10 | GL | 170V | GND | O1 | O10 | MP10 | 8 | 4 | 9 | 3 | 2 | 0 | 1 | 5 | 7 | 6
bPlace: 2020.05.01